# Altium PCB PCB2.PcbDoc
Units mm, origin at the board's own origin, x right, y up, seen from the top; angles counter-clockwise.
Board outline 45.34 x 28.96 mm, 2 copper layers (Top Layer, Bottom Layer); 7 components, 10 nets, 46 pads, 0 vias.
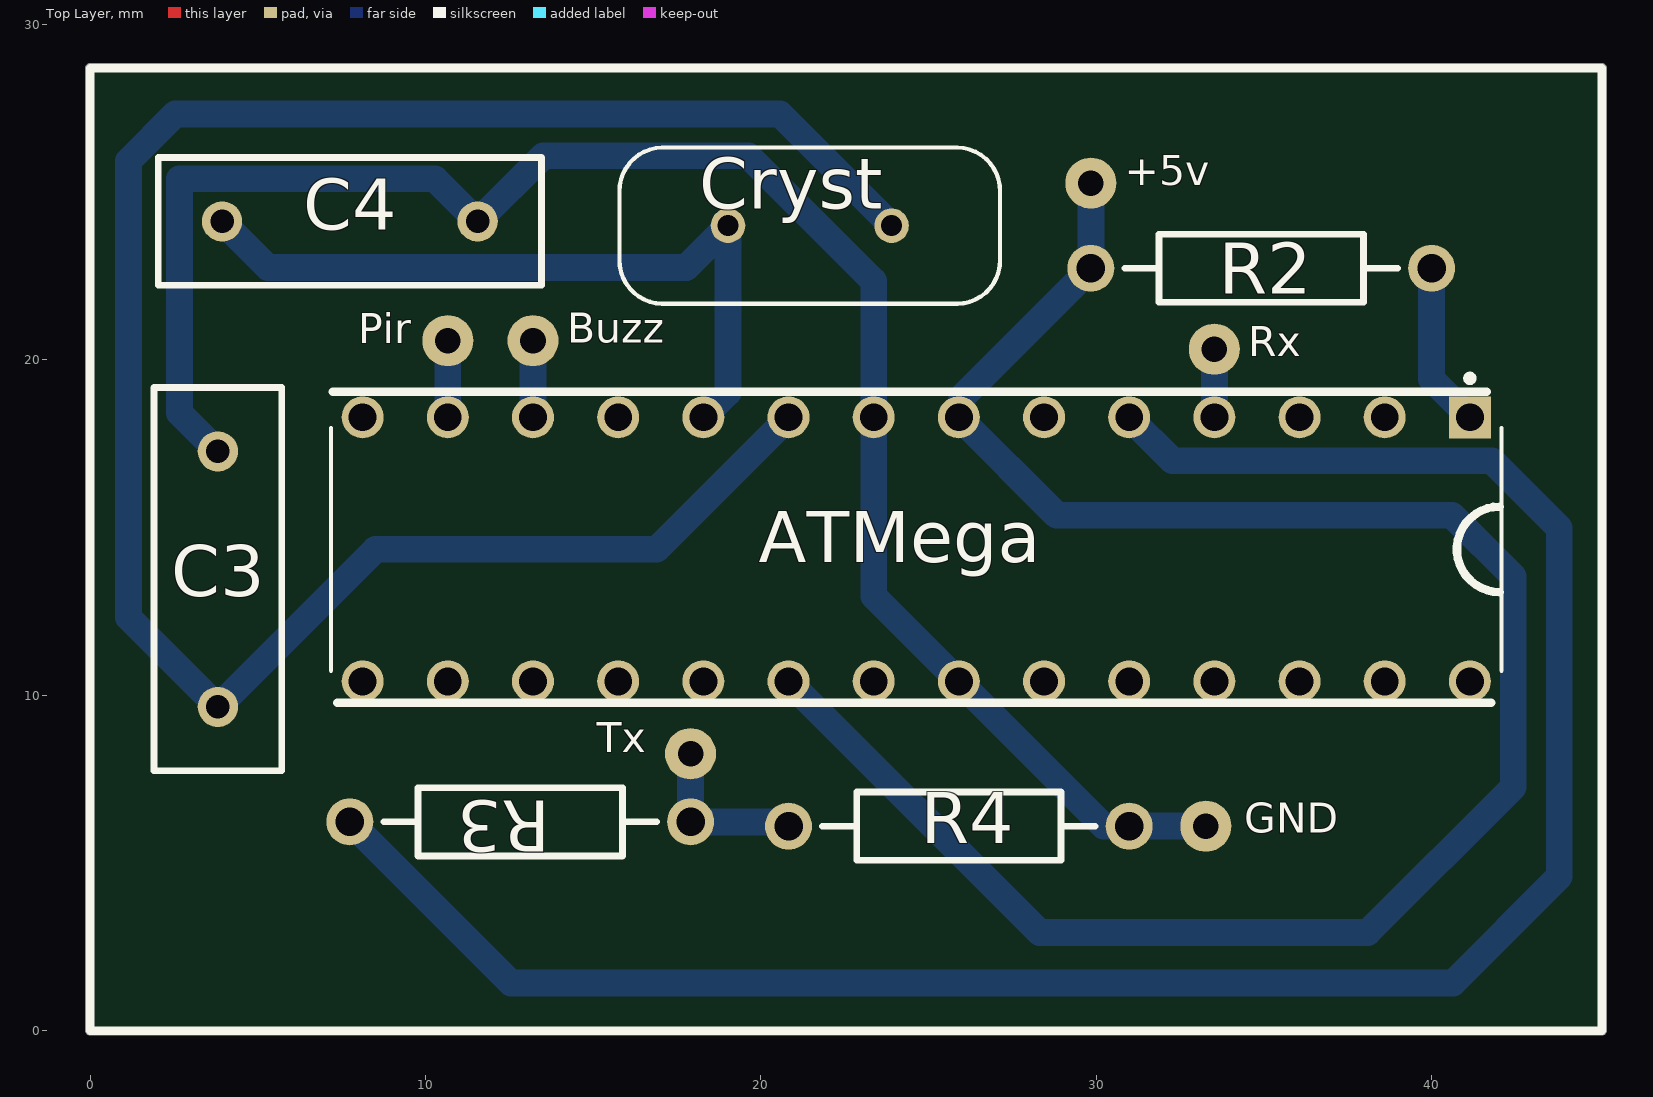
[diagram p0: Top Layer view]
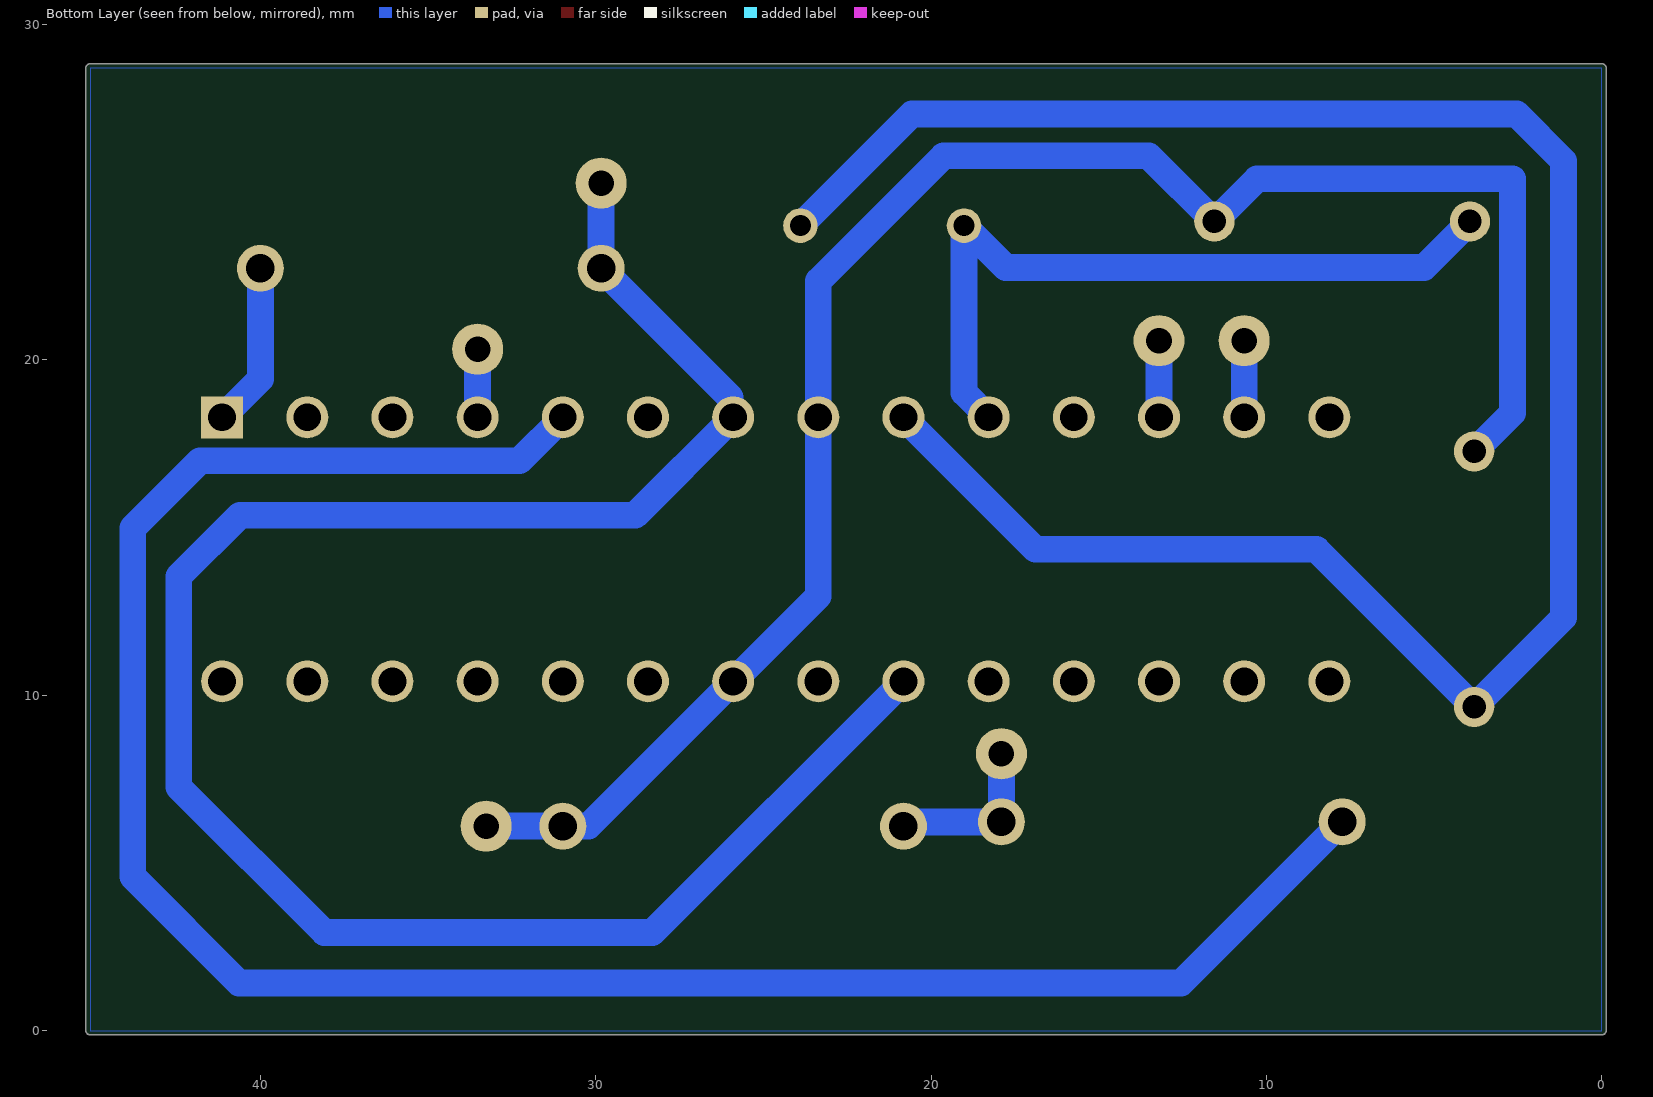
[diagram p1: Bottom Layer view, seen from below]

## Layer stack, top to bottom
Top Solder: solder mask 0.0102, Solder Resist, Dk 3.5
Top Layer: signal copper 0.0356
Dielectric 1: dielectric 0.32, FR-4, Dk 4.8
Bottom Layer: signal copper 0.0356
Bottom Solder: solder mask 0.0102, Solder Resist, Dk 3.5

## Board outline
0,-0.127 cw(c0,0) -0.127,0 -0.127,28.702 cw(c0,28.702) 0,28.829 45.085,28.829 cw(c45.085,28.702) 45.212,28.702 45.212,0 cw(c45.085,0) 45.085,-0.127

## Design rules (kind name [scope] priority, off if disabled: settings)
Clearance [All] p1: gap=0.254 ignorepadtopadclearanceinfootprint=FALSE except(0: Arc-Hole Track-Hole SMDPad-Hole THPad-Hole Via-Hole Fill-Hole Poly-Hole Region-Hole Text-Hole)
PolygonConnect [All] p1: connectstyle=Relief reliefconductorwidth=0.254 reliefentries=4 polygonreliefangle="90 Angle" airgapwidth=0.254
RoutingLayers [All] p1: top layer_v5=FALSE bottom layer_v5=TRUE
RoutingVias [All] p1: holewidth=0.711 width=1.27 viastyle="Through Hole" minholewidth=0.711 minwidth=1.27 maxholewidth=0.711 maxwidth=1.27
SolderMaskExpansion [All] p1: expansion=0.102 istentingtop=FALSE
Width [All] p1: maxlimit=0.8 minlimit=0.8 preferedwidth=0.8 minimp=50.000000 maximp=50.000000 favimp=50.000000
29 further rules are at their usual default settings.

## Components (designator, comment, footprint, x,y, rotation, side; value= is the part's Value field where it differs from the comment)
ATMega "ATMEGA328-PU" DIP787W46P254L3467H508Q28 24.638,14.351 r270 top
C3 "Cap" RAD-0.3 3.81,13.462 r270 top value=22pF
C4 "Cap" RAD-0.3 7.747,24.13 r180 top value=22pF
Cryst "ECS-160-S-4" XTAL_ECS-160-20-4X 21.463,24.003 r0 top
R2 "Res2" AXIAL-0.4 34.925,22.733 r180 top value=1K
R3 "Res2" AXIAL-0.4 12.827,6.223 r180 top value=10k
R4 "Res2" AXIAL-0.4 25.908,6.096 r180 top value=20K

## Footprints (in the part's own frame and the unit in brackets; to place one, negate y for a bottom-side part, rotate by r counter-clockwise, add the part's x,y. Pads: shape width x height; smd on the part's side, far side on the other; paste and mask are expansions set on the pad)
AXIAL-0.4 [mm] "Axial Device, Thru-Hole; 2 Leads; 0.4 in Pin Spacing"
  round 1.4 hole 0.85: 1(-5.08,0) 2(5.08,0)
  silkscreen extent -4.06,-1.02 4.06,1.02
DIP787W46P254L3467H508Q28 [mm]
  rect 1.25x1.25 hole 0.83: 1(-3.937,16.51)
  round 1.25 hole 0.83: 2(-3.937,13.97) 3(-3.937,11.43) 4(-3.937,8.89) 5(-3.937,6.35) 6(-3.937,3.81) 7(-3.937,1.27) 8(-3.937,-1.27) 9(-3.937,-3.81) 10(-3.937,-6.35) 11(-3.937,-8.89) 12(-3.937,-11.43) 13(-3.937,-13.97) 14(-3.937,-16.51) 15(3.937,-16.51) 16(3.937,-13.97) 17(3.937,-11.43) 18(3.937,-8.89) 19(3.937,-6.35) 20(3.937,-3.81) 21(3.937,-1.27) 22(3.937,1.27) 23(3.937,3.81) 24(3.937,6.35) 25(3.937,8.89) 26(3.937,11.43) 27(3.937,13.97) 28(3.937,16.51)
  silkscreen extent -5.2,-17.45 3.62,17.45
RAD-0.3 [mm] "Radial Cap, Thru-Hole; 2 Leads; 0.3 in Pin Spacing"
  round 1.2 hole 0.7: 1(-3.81,0) 2(3.81,0)
  silkscreen extent -5.71,-1.91 5.71,1.91
XTAL_ECS-160-20-4X [mm]
  round 1.03 hole 0.63: 1(-2.44,0) 2(2.44,0)
  silkscreen extent -5.68,-2.33 5.68,2.33

## Part data
ATMega: "AVR AVRÂ® ATmega Microcontroller IC 8-Bit 20MHz 32KB (16K x 16) FLASH 28-PDIP", Package=None, Availability=Unavailable, MP=ATMEGA328-PU, Price=None
C3 C4: "Capacitor", LatestRevisionDate=17-Jul-2002, LatestRevisionNote="Re-released for DXP Platform.", PackageDescription="Radial Cap, Thru-Hole; 2 Leads; 0.3 in Pin Spacing", PackageReference=RAD-0.3, Published=8-Jun-2000, Publisher="Altium Limited"
Cryst: "16MHz Â±30ppm Crystal Series 40 Ohms HC-49/US", Package="HC49/US ECS International", Availability=Unavailable, MF="ECS Inc.", MP=ECS-160-S-4, Price=None, SnapEDA_Link=https://www.snapeda.com/parts/ECS-160-S-4/ECS%20Inc./view-part/3657575/?ref=snap
R2 R3 R4: "Resistor", LatestRevisionDate=17-Jul-2002, LatestRevisionNote="Re-released for DXP Platform.", PackageDescription="Axial Device, Thru-Hole; 2 Leads; 0.4 in Pin Spacing", PackageReference=AXIAL-0.4, Published=8-Jun-2000, Publisher="Altium Limited"

## Free pads (board coordinates)
  round 1.524 hole 0.762: 8(29.845,25.273) 9(10.668,20.574) 10(13.208,20.574) 11(33.274,6.096) 12(33.528,20.32) 13(17.907,8.255)

## Nets (pads, with @x,y where several pads share a name; then routed paths per layer and width w, separated by ;. In a path a pad name is that pad's centre, name@x,y a point inside that pad or via, vN(x,y) a via of type N, cw(c..) or ccw(c..) an arc to the next point about the centre after c; other vN are vias at no path point)
+5v: ATMega.7 ATMega.20 pad.8 R2.2 | length 59.9
  Bottom Layer w0.8: ATMega.20 28.321,2.921 38.1,2.921 42.443,7.264 42.443,13.538 40.615,15.367 28.829,15.367 ATMega.7 25.994,18.374 25.994,18.882 R2.2 pad.8
Buzz+: ATMega.12 pad.10 | length 2.3
  Bottom Layer w0.8: ATMega.12 pad.10
GND: ATMega.8 ATMega.22 C3.1 C4.1 pad.11 R4.1 | length 54.3
  Bottom Layer w0.8: C3.1 2.667,18.415 2.667,25.4 10.287,25.4 C4.1 13.513,26.086 19.634,26.086 23.368,22.352 ATMega.8 23.368,12.954 ATMega.22 30.226,6.096 R4.1 pad.11
NetATMega_1: ATMega.1 R2.1 | length 4.9
  Bottom Layer w0.8: R2.1 40.005,19.431 ATMega.1
NetATMega_5: ATMega.5 R3.2 | length 64
  Bottom Layer w0.8: R3.2 12.548,1.422 40.64,1.422 43.815,4.597 43.815,14.986 41.808,16.993 32.283,16.993 ATMega.5
NetATMega_9: ATMega.9 C3.2 Cryst.2 | length 62.7
  Bottom Layer w0.8: ATMega.9 16.891,14.351 8.509,14.351 C3.2 1.143,12.319 1.143,25.933 2.54,27.33 20.576,27.33 Cryst.2
NetATMega_10: ATMega.10 C4.2 Cryst.1 | length 22.2
  Bottom Layer w0.8: C4.2 5.309,22.758 17.778,22.758 Cryst.1 19.023,19.023 ATMega.10
Pir-in: ATMega.13 pad.9 | length 2.3
  Bottom Layer w0.8: ATMega.13 pad.9
RX-TX: ATMega.4 pad.12 | length 2
  Bottom Layer w0.8: ATMega.4 pad.12
TX-RX: pad.13 R3.1 R4.2 | length 5
  Bottom Layer w0.8: pad.13 R3.1 20.539,6.223 20.666,6.096 R4.2
pads on no net: ATMega.2 ATMega.3 ATMega.6 ATMega.11 ATMega.14 ATMega.15 ATMega.16 ATMega.17 ATMega.18 ATMega.19 ATMega.21 ATMega.23 ATMega.24 ATMega.25 ATMega.26 ATMega.27 ATMega.28

## Polygon pours and split planes (outlines as drawn)
no net on Bottom Layer "NONET_L02_P000" (solid, remove dead copper, pour order 0): 0,28.702 45.085,28.702 45.085,0 0,0 0,0.127

## Silkscreen, mask and mechanical layers (free items; w line width, h text height)
Top Overlay:
  lines w0.254: 7.239,19.05 41.656,19.05 ; 7.366,9.779 41.783,9.779 ; 42.037,13.075 cw(c42.037,14.351) 42.037,15.627 ; 0,0 45.085,0 45.085,28.702 0,28.702 0,0
  text "+5v" at 30.861,24.909 h1.52
  text "Buzz" at 14.224,20.209 h1.52
  text "Pir" at 8.001,20.193 h1.52
  text "Rx" at 34.544,19.812 h1.52
  text "Tx" at 15.113,8.001 h1.52
  text "GND" at 34.417,5.605 h1.52